# EAGLE board controller (EAGLE 9.6.2)

Size 160 x 100 mm. Coordinates in mm from the lower left corner, seen from the top.
Outline: 0,0 160,0 160,100 0,100 0,0
Copper layers (1*16): Top 0.035mm / dielectric 1.5mm / Bottom 0.035mm
Design rules "default": minimum track width 6mil, minimum drill 0.35mm, track to track 6mil, track to pad 6mil, pad to pad 6mil, via to via 6mil, smd to smd 6mil, copper to edge 40mil, drill to drill 6mil, minimum pad ring 10mil, minimum via ring 8mil, stop-mask expansion 4mil, vias tented up to drill 0mil, thermal gap 10mil

## Footprints (pad centres in the part's own frame; a part is rotated, then mirrored left to right if it is on the bottom)
153CLV-1010 = smd 4 x 2.5: + 4,0; - -4,0
0805 = smd 0.8 x 1.2: 1 -0.9,0; 2 0.9,0
C1206 = smd 1.6 x 1.8: 1 -1.4,0; 2 1.4,0
SOD-123FL = smd 0.91 x 1.22: A 1.637,0; C -1.637,0
DO-214AC = smd 1.8 x 2.4: A 2.025,0; C -2.025,0
TQFP32-08 = smd 1.27 x 0.559: 1 -4.293,2.8; 2 -4.293,2; 3 -4.293,1.2; 4 -4.293,0.4; 5 -4.293,-0.4; 6 -4.293,-1.2; 7 -4.293,-2; 8 -4.293,-2.8; 17 4.293,-2.8; 18 4.293,-2; 19 4.293,-1.2; 20 4.293,-0.4; 21 4.293,0.4; 22 4.293,1.2; 23 4.293,2; 24 4.293,2.8 | smd 0.559 x 1.27: 9 -2.8,-4.293; 10 -2,-4.293; 11 -1.2,-4.293; 12 -0.4,-4.293; 13 0.4,-4.293; 14 1.2,-4.293; 15 2,-4.293; 16 2.8,-4.293; 25 2.8,4.293; 26 2,4.293; 27 1.2,4.293; 28 0.4,4.293; 29 -0.4,4.293; 30 -1.2,4.293; 31 -2,4.293; 32 -2.8,4.293
TO263-5 = smd 1.067 x 2.159: 1 -3.404,-5.791; 2 -1.702,-5.791; 3 0,-5.791; 4 1.702,-5.791; 5 3.404,-5.791 | smd 10.8 x 10.41: 6 0,2.54
PIC_ICSP_MINI_5_PIN = drill 0.7: 1 -3,0; 2 -1.5,0; 3 0,0; 4 1.5,0; 5 3,0
2X3 = drill 1.016 pad 1.88 octagon: 1 0,0; 2 0,2.54; 3 2.54,0; 4 2.54,2.54; 5 5.08,0; 6 5.08,2.54
LED3MM = drill 0.813 pad 1.676 octagon: A -1.27,0; K 1.27,0
TACTILE-SWITCH-1101NE = smd 2.3 x 1.6: 1 -3.15,0; 2 3.15,0
ED350V-02P = drill 1 pad 2.184: P$1 0,0; P$2 3.5,0
SOT223 = smd 1.219 x 2.235: 1 -2.311,-3.099; 2 0,-3.099; 3 2.311,-3.099 | smd 3.6 x 2.2: 4 0,3.099
RESONATOR-SMD = smd 0.45 x 1.905: 1 -1.2,0; 2 0,0; 3 1.2,0

## Placement (x,y rotation side)
C1  100uf  [153CLV-1010]  17.78,13.97 270 top
C2  1000uf  [153CLV-1010]  43.18,13.97 270 top
C3  0.1uF  [0805]  30.48,69.85 0 top
C4  22uF  [C1206]  30.48,64.77 0 top
C5  4.7uF  [C1206]  25.4,25.4 0 top
C6  0.1uF  [0805]  26.67,69.85 0 top
C7  0.1uF  [0805]  22.86,69.85 0 top
C8  0.1uF  [0805]  19.05,69.85 0 top
C9  0.1uF  [0805]  13.97,5.08 0 top
C10  0.1uF  [0805]  43.18,5.08 0 top
C13  0.1uF  [0805]  11.43,69.85 0 top
C18  0.1  [0805]  16.51,39.37 0 top
D1  1N5822  [SOD-123FL]  19.05,5.08 180 top
D4  SZ105B  [DO-214AC]  22.86,57.15 0 top
IC1  MEGA8-AI  [TQFP32-08]  10.16,29.21 0 top
IC4  LM2576HVT-5V  [TO263-5]  30.48,11.43 0 top
J1  PIC_ICSP_MINI_5_PIN  [PIC_ICSP_MINI_5_PIN]  11.43,21.59 180 top
J4  SPI  [2X3]  24.13,45.72 0 top
LED2  PW  [LED3MM]  52.07,15.24 270 top
R9  10k  [0805]  11.43,63.5 0 top
R13  4.7k  [0805]  7.62,63.5 0 top
R14  1k  [0805]  52.07,7.62 270 top
R15  2.2k  [0805]  34.29,69.85 0 top
S1  MCU_RST  [TACTILE-SWITCH-1101NE]  7.62,55.88 0 top
T2  60VDC  [ED350V-02P]  7.62,11.43 90 top
U4  LM1117 3.3  [SOT223]  17.78,46.99 0 top
Y1  16MHZ  [RESONATOR-SMD]  15.24,63.5 0 top

## Library data of the parts
C1 C2 C4 C5 D1 LED2 = adafruit
C3 C6-C10 C13 C18 = SparkFun-Passives
D4 = diode
IC1 = atmel; MPN: ATMEGA8-16AU; OC_FARNELL: 9171371; OC_NEWARK: 73M8863
IC4 = v-reg-3
J1 = SparkFun-Connectors; PROD_ID: CONN-08314; SF_ID: PRT-11264
J4 = SparkFun-Connectors
R9 R13-R15 = SparkFun-Resistors
S1 = SparkFun-Electromechanical; PROD_ID: SWCH-00815
T2 = con-dinkle
U4 = SparkFun-PowerIC; PROD_ID: VREG-08170
Y1 = SparkFun-FreqCtrl; PROD_ID: XTAL-08900

## Nets
3.3V: C3.1 C4.1 U4.2 U4.4
A0: C18.1 D4.C IC1.23 R13.1 R15.2
A1: IC1.24
A2: IC1.25
A3: IC1.26
CS: IC1.14
D2: IC1.32
D3: IC1.1
D4: IC1.2
D5: IC1.9
D6: IC1.10
D7: IC1.11
D8: IC1.12
D9: IC1.13
GND: C1.- C2.- C3.2 C4.2 C5.2 C6.1 C7.1 C9.2 C10.2 C13.2 C18.2 D1.A D4.A IC1.3 IC1.5 IC1.21 IC4.3 IC4.5 J1.5 J4.6 R14.2 R15.1 S1.1 T2.P$1 U4.1 Y1.2
MISO: IC1.16 J4.1
MOSI: IC1.15 J4.4
N$1: C1.+ C9.1 IC4.1 T2.P$2
N$2: D1.C IC4.2
N$5: IC1.8 Y1.3
N$7: IC1.7 Y1.1
N$8: C7.2 IC1.20
N$9: C8.1 J1.1
N$12: LED2.K R14.1
RST: C8.2 IC1.29 J4.5 R9.1 S1.2
RXD: IC1.30 J1.3
SCK: IC1.17 J4.3
SCL: IC1.28
SDA: IC1.27
SENS_IN: R13.2
TXD: IC1.31 J1.2
VCC: C2.+ C5.1 C6.2 C10.1 C13.1 IC1.4 IC1.6 IC1.18 IC4.4 J1.4 J4.2 LED2.A R9.2 U4.3

## Tracks (layer width: path | path; a pad name or v marks a point on that pad's centre or on a via)
3.3V  (3 unrouted)
A0  (4 unrouted)
GND  (25 unrouted)
MISO  (1 unrouted)
MOSI  (1 unrouted)
N$1  (3 unrouted)
N$2  (1 unrouted)
N$5  (1 unrouted)
N$7  (1 unrouted)
N$8  (1 unrouted)
N$9  (1 unrouted)
N$12  (1 unrouted)
RST  (4 unrouted)
RXD  (1 unrouted)
SCK  (1 unrouted)
TXD  (1 unrouted)
VCC  (13 unrouted)